# EAGLE board BTG (EAGLE 7.7.0)
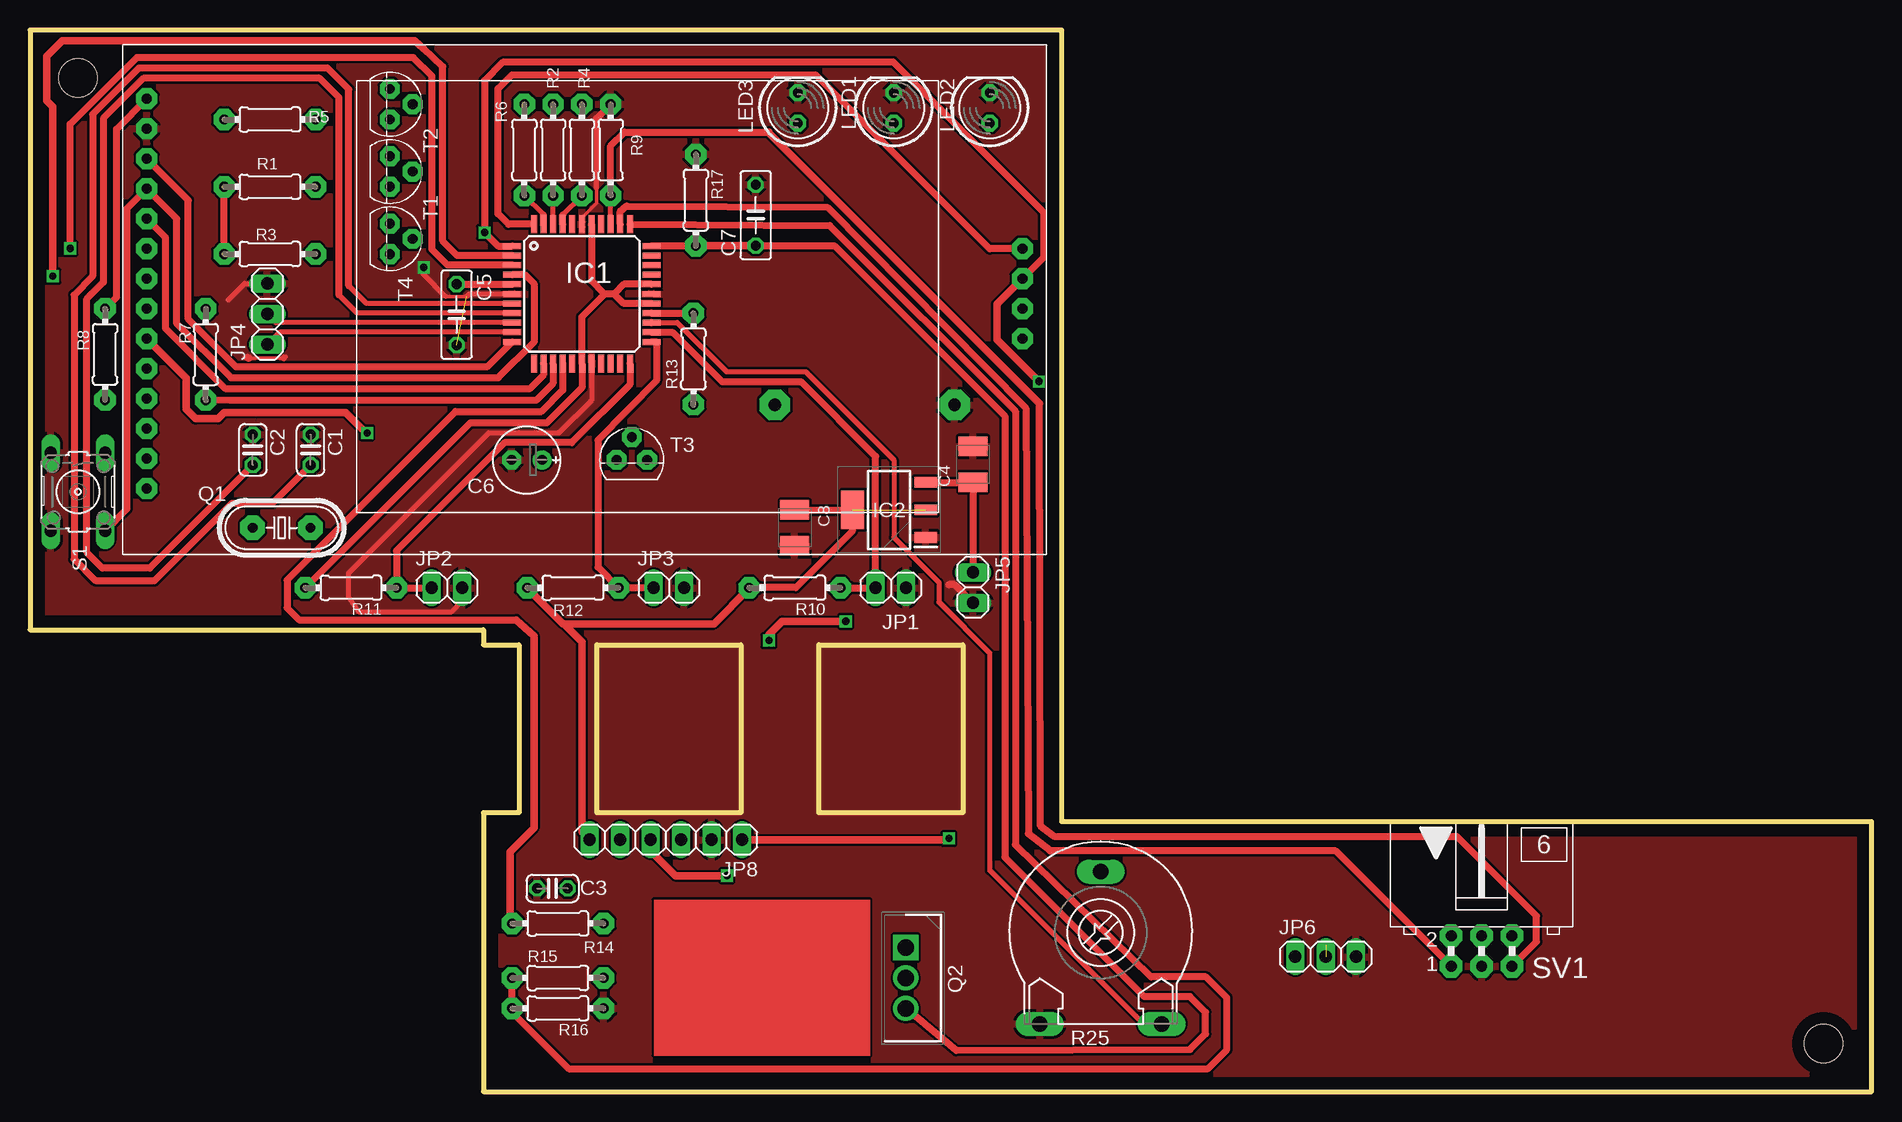
[diagram p0: board, top side]
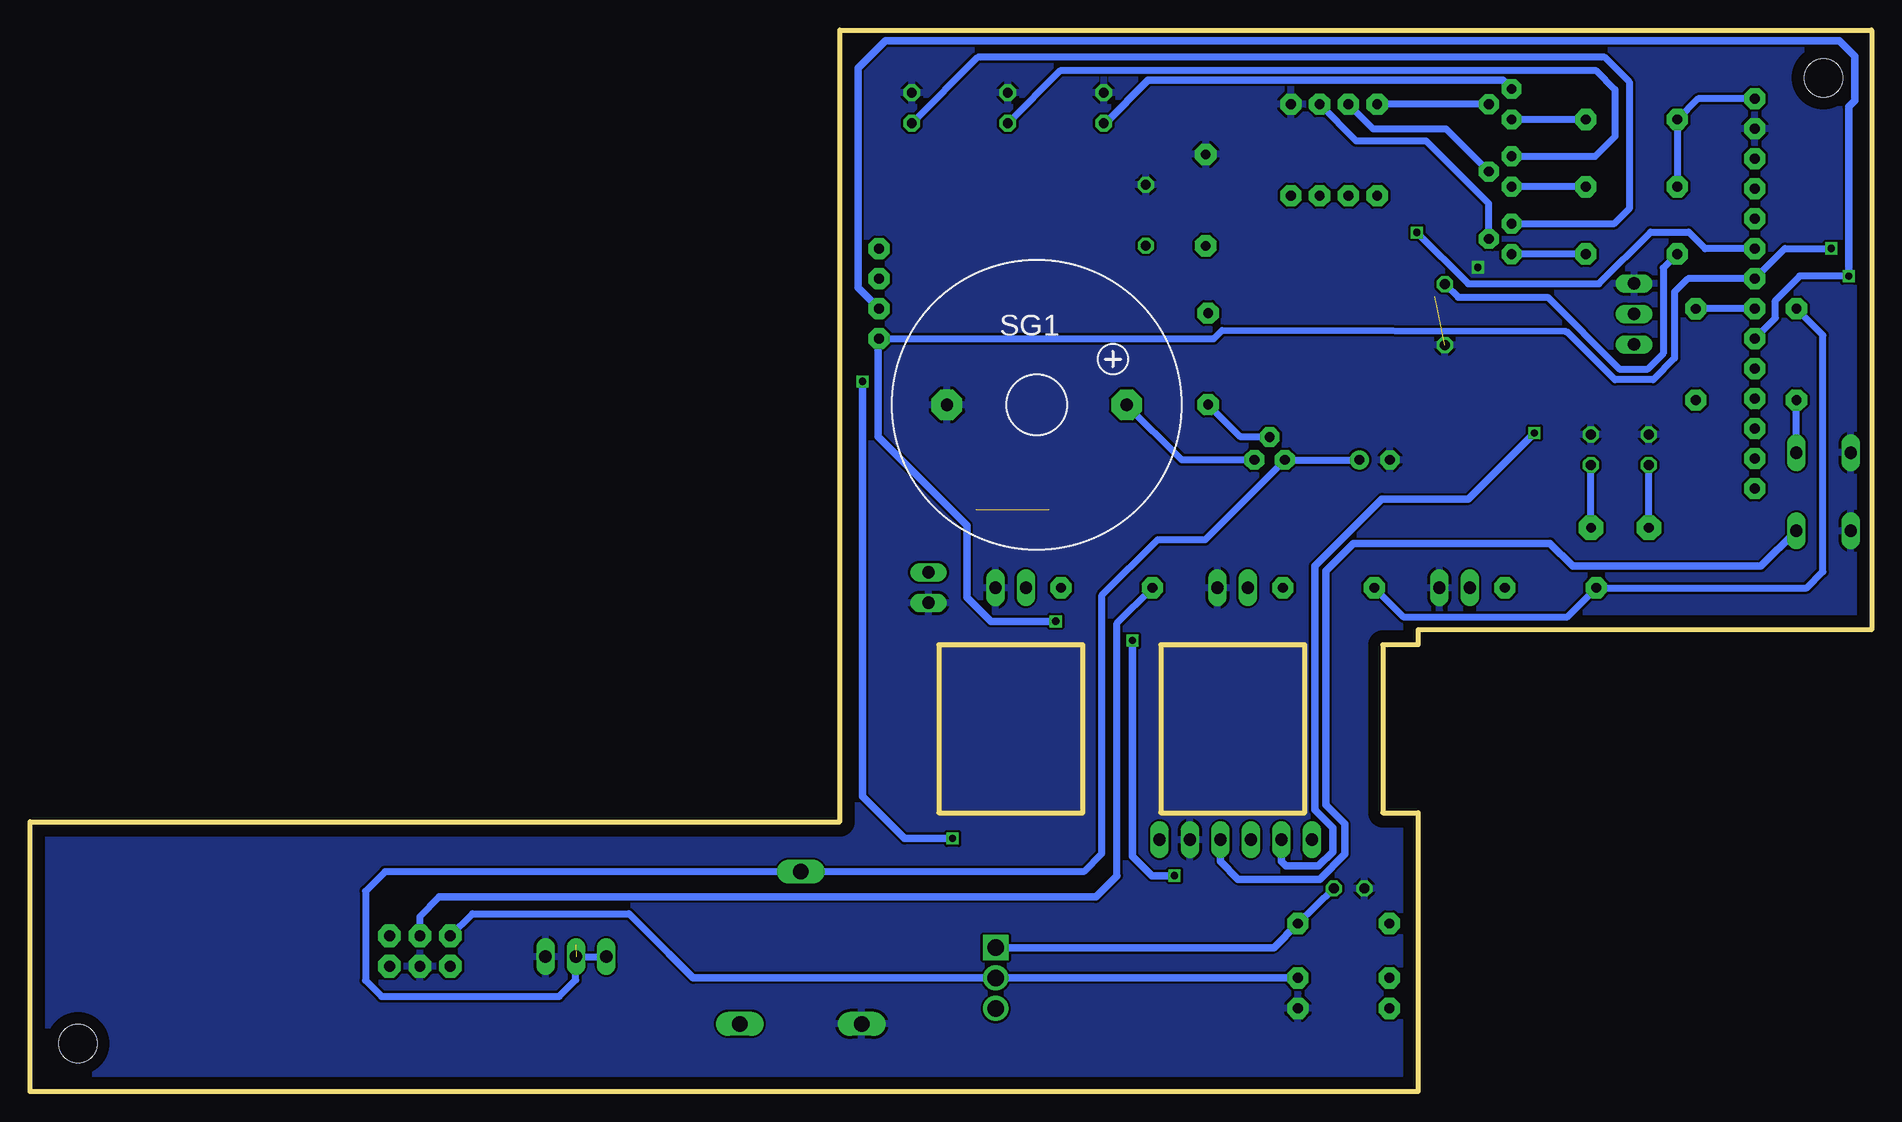
[diagram p1: board, bottom side, seen from below]

Size 153.5 x 88.5 mm. Coordinates in mm from the lower left corner, seen from the top.
Outline: 0,38.5 37.8,38.5 37.8,37.25 40.75,37.25 40.75,23.25 37.8,23.25 37.8,0 153.5,0 153.5,22.5 86,22.5 86,88.5 0,88.5 0,38.5
Copper layers (1*16): Top 0.035mm / dielectric 1.5mm / Bottom 0.035mm
Design rules "default": minimum track width 10mil, minimum drill 24mil, track to track 8mil, track to pad 8mil, pad to pad 8mil, via to via 8mil, smd to smd 8mil, copper to edge 40mil, drill to drill 8mil, minimum pad ring 10mil, minimum via ring 8mil, stop-mask expansion 4mil, vias tented up to drill 0mil, thermal gap 10mil
Holes 3.2 mm at 4.01,84.51 149.5,4
Milling: 8 lines

## Footprints (pad centres in the part's own frame; a part is rotated, then mirrored left to right if it is on the bottom)
C025-024X044 = drill 0.813 octagon: 1 -1.27,0; 2 1.27,0
SMC_B = smd 1.6 x 2.4: + -1.5,0; - 1.5,0
C050-025X075 = drill 0.813 octagon: 1 -2.54,0; 2 2.54,0
E2,5-6E = drill 0.813 pad 1.575: + -1.27,0 | drill 0.813 pad 1.575 octagon: - 1.27,0
TQFP44 = smd 1.5 x 0.5: 1 -5.8,4; 2 -5.8,3.2; 3 -5.8,2.4; 4 -5.8,1.6; 5 -5.8,0.8; 6 -5.8,0; 7 -5.8,-0.8; 8 -5.8,-1.6; 9 -5.8,-2.4; 10 -5.8,-3.2; 11 -5.8,-4; 23 5.8,-4; 24 5.8,-3.2; 25 5.8,-2.4; 26 5.8,-1.6; 27 5.8,-0.8; 28 5.8,0; 29 5.8,0.8; 30 5.8,1.6; 31 5.8,2.4; 32 5.8,3.2; 33 5.8,4 | smd 0.5 x 1.5: 12 -4,-5.8; 13 -3.2,-5.8; 14 -2.4,-5.8; 15 -1.6,-5.8; 16 -0.8,-5.8; 17 0,-5.8; 18 0.8,-5.8; 19 1.6,-5.8; 20 2.4,-5.8; 21 3.2,-5.8; 22 4,-5.8; 34 4,5.8; 35 3.2,5.8; 36 2.4,5.8; 37 1.6,5.8; 38 0.8,5.8; 39 0,5.8; 40 -0.8,5.8; 41 -1.6,5.8; 42 -2.4,5.8; 43 -3.2,5.8; 44 -4,5.8
SOT230P700X180-4N = smd 1.9 x 0.9: 1 -3.05,2.3; 2 -3.05,0; 3 -3.05,-2.3 | smd 1.9 x 3.2: 4 3.05,0
1X02 = drill 1.016 long: 1 -1.27,0; 2 1.27,0
1X03 = drill 1.016 long: 1 -2.54,0; 2 0,0; 3 2.54,0
1X06 = drill 1.016 long: 1 -6.35,0; 2 -3.81,0; 3 -1.27,0; 4 1.27,0; 5 3.81,0; 6 6.35,0
LED5MM = drill 0.813 pad 1.397 octagon: A -1.27,0; K 1.27,0
HC49U-V = drill 0.813 pad 2.032 octagon: 1 -2.413,0; 2 2.413,0
TO254P465X1031X1954-3P = drill 1.39 pad 2.085 square: 1 0,0 | drill 1.39 pad 2.085: 2 2.54,0; 3 5.08,0
0204/7 = drill 0.813 pad 1.778 octagon: 1 -3.81,0; 2 3.81,0
LI15 = drill 1.321 long: A -5.08,-7.62; E 5.08,-7.62; S 0,5.08
B3F-10XX = drill 1.016 long: 1 -3.251,2.261; 2 3.251,2.261; 3 -3.251,-2.261; 4 3.251,-2.261
F/CM04P = drill 1.016 pad 2.54 octagon: + 7.493,0; - -7.493,0
ML6L = drill 0.914 pad 1.905 octagon: 1 -2.54,-1.27; 2 -2.54,1.27; 3 0,-1.27; 4 0,1.27; 5 2.54,-1.27; 6 2.54,1.27
TO92 = drill 0.813 pad 1.651 octagon: 1 1.27,0; 2 0,1.905; 3 -1.27,0
ILI9341 = drill 0.8 pad 1.778 octagon: CS 2,-9.5; DC 2,-14.5; GND 2,-7; LED 2,-22; RESET 2,-12; SCK 2,-19.5; SD_CS 75,-17; SD_MISO 75,-22; SD_MOSI 75,-19.5; SD_SCK 75,-24.5; SDI(MOSI) 2,-17; SDO(MISO) 2,-24.5; T_CLK 2,-27; T_CS 2,-29.5; T_DIN 2,-32; T_DO 2,-34.5; T_IRQ 2,-37; VCC 2,-4.5

## Placement (x,y rotation side)
C1  [C025-024X044]  23.39,53.5 270 top
C2  [C025-024X044]  18.57,53.5 270 top
C3  [C025-024X044]  43.55,16.93 180 top
C4  [SMC_B]  78.6,52.29 90 top
C5  [C050-025X075]  35.56,64.77 270 top
C6  [E2,5-6E]  41.41,52.66 180 top
C7  [C050-025X075]  60.49,73.06 90 top
C8  [SMC_B]  63.74,47 270 top
IC1  ATMEGA644A  [TQFP44]  46,66.5 0 top
IC2  LMS8117AMP-3.3_NOPB  [SOT230P700X180-4N]  71.61,48.5 180 top
JP1  [1X02]  71.75,42 0 top
JP2  [1X02]  34.75,42 0 top
JP3  [1X02]  53.25,42 0 top
JP4  [1X03]  19.79,64.83 90 top
JP5  [1X02]  78.6,42.02 270 top
JP6  [1X03]  108,11.25 0 top
JP8  [1X06]  53,21 180 top
LED1  [LED5MM]  72,82 90 top
LED2  [LED5MM]  80,82 90 top
LED3  [LED5MM]  64,82 90 top
Q1  [HC49U-V]  20.97,47 0 top
Q2  IRLZ14PBF  [TO254P465X1031X1954-3P]  73,12 270 top
R1  [0204/7]  20,75.43 180 top
R2  [0204/7]  43.6,78.5 270 top
R3  [0204/7]  20,69.82 180 top
R4  [0204/7]  46,78.5 270 top
R5  [0204/7]  20,81.04 180 top
R6  [0204/7]  41.2,78.5 270 top
R7  [0204/7]  14.65,61.45 270 top
R8  [0204/7]  6.26,61.46 270 top
R9  [0204/7]  48.4,78.5 270 top
R10  [0204/7]  63.75,42 180 top
R11  [0204/7]  26.75,42 180 top
R12  [0204/7]  45.25,42 180 top
R13  [0204/7]  55.3,61.08 90 top
R14  [0204/7]  44,14.01 180 top
R15  [0204/7]  44,9.47 0 top
R16  [0204/7]  44,6.93 180 top
R17  [0204/7]  55.5,74.32 270 top
R25  [LI15]  89.25,13.25 0 top
S1  [B3F-10XX]  4,50 270 top
SG1  F/CM04P  [F/CM04P]  69.58,57.25 0 bottom
SV1  [ML6L]  121,11.71 0 top
T1  2N3904  [TO92]  30,76.7 270 top
T2  2N3904  [TO92]  30,82.31 270 top
T3  2N3904  [TO92]  50.16,52.66 0 top
T4  2N3904  [TO92]  30,71.09 270 top
U$1  ILI9341  [ILI9341]  7.73,87.27 0 top

## Library data of the parts
C1-C3 C5 C7 = resistor
C4 C6 C8 R1-R17 = rcl
IC1 = atmel; MPN: ATMEGA644PV-10AU; OC_FARNELL: 1455123; OC_NEWARK: 58M3748
IC2 = LMS8117AMP-3.3_NOPB; DESCRIPTION: LMS8117AMP-3.3/NOPB, Low Dropout Voltage Regulator, 1A, 3.3 V +/-1%, 2.5 15 Vin, 4-Pin SOT-223; HEIGHT: 1.8mm; MANUFACTURER_NAME: Texas Instruments; MANUFACTURER_PART_NUMBER: LMS8117AMP-3.3/NOPB; MOUSER_PART_NUMBER: 926-LMS8117AMP33NOPB; MOUSER_PRICE-STOCK: https://www.mouser.com/Search/Refine.aspx?Keyword=926-LMS8117AMP33NOPB; RS_PART_NUMBER: 5360313P; RS_PRICE-STOCK: http://uk.rs-online.com/web/p/products/5360313P
JP1-JP6 JP8 = pinhead
LED1-LED3 = led
Q1 = crystal; OC_FARNELL: 1666969; OC_NEWARK: unknown
Q2 = IRLZ14PBF; ARROW_PART_NUMBER: IRLZ14PBF; ARROW_PRICE-STOCK: https://www.arrow.com/en/products/irlz14pbf/vishay; DESCRIPTION: N-channel logicFET,IRLZ14 10A 60V; HEIGHT: 4.65mm; MANUFACTURER_NAME: Vishay; MANUFACTURER_PART_NUMBER: IRLZ14PBF; MOUSER_PART_NUMBER: 844-IRLZ14PBF; MOUSER_PRICE-STOCK: https://www.mouser.co.uk/ProductDetail/Vishay-Semiconductors/IRLZ14PBF?qs=cvaI6ThkwxuEdeJ8YmO4Qg%3D%3D
R25 = pot
S1 = switch-omron; MPN: B3F-1000; OC_FARNELL: 176432; OC_NEWARK: 36M3542
SG1 = buzzer; OC_FARNELL: unknown; OC_NEWARK: unknown
SV1 = con-ml; OC_FARNELL: unknown; OC_NEWARK: unknown
T1-T4 = transistor
U$1 = ILI9341

## Nets
+3V3: C5.1 C8.+ IC1.5 IC1.17 IC1.27 IC1.29 IC1.38 IC2.2 IC2.4 JP8.6 R1.2 R3.2 R5.2 R8.1 R10.2 R11.2 R12.2 SV1.4 U$1.VCC
+5V: C4.+ IC2.3 JP5.1
ADAPTER_BAT: IC1.36 R9.2 SV1.5
ADC3: IC1.34 R15.1 R16.2
ADC4: C7.1 IC1.33 Q2.3 R17.2
AUDIO_1: IC1.26 R13.2
AUDIO_2: IC1.25 R25.E
GND: C1.1 C2.1 C3.2 C4.- C5.2 C6.- C7.2 C8.- IC1.6 IC1.18 IC1.28 IC1.39 IC2.1 JP1.2 JP2.2 JP3.2 JP4.3 JP5.2 JP6.3 JP8.2 LED1.K LED2.K LED3.K R9.1 R16.1 R17.1 R25.A S1.3 S1.4 SG1.- SV1.3 U$1.GND
LED_GREEN: IC1.43 R6.2
LED_ORANGE: IC1.41 R4.2
LED_RED: IC1.42 R2.2
MISO: IC1.2 JP8.5 U$1.SD_MISO U$1.SDO(MISO)
MOSI: IC1.1 JP8.1 U$1.SD_MOSI U$1.SDI(MOSI)
N$1: R1.1 T1.1
N$2: R2.1 T1.2
N$3: LED1.A T1.3
N$4: LED2.A T4.3
N$5: R4.1 T4.2
N$6: R3.1 T4.1
N$7: R5.1 T2.1
N$8: R6.1 T2.2
N$9: LED3.A T2.3
N$10: R7.1 U$1.LED
N$11: C1.2 IC1.7 Q1.2
N$12: R8.2 S1.1
N$13: R13.1 T3.2
N$14: SG1.+ T3.1
N$15: C2.2 IC1.8 Q1.1
N$16: C6.+ JP6.1 JP6.2 R25.S T3.3
N$17: C3.1 Q2.1 R14.1
PWM: IC1.15 R14.2
RESET: IC1.4 JP8.3 S1.2 U$1.RESET
RX: IC1.9 JP4.2
SCK: IC1.3 JP8.4 U$1.SCK U$1.SD_SCK
SD_CS: IC1.44 U$1.SD_CS
TASTER_1: IC1.22 JP2.1 R11.1
TASTER_2: IC1.23 JP3.1 R12.1
TASTER_3: IC1.24 JP1.1 R10.1
TFT_CS: IC1.11 U$1.CS
TFT_DC: IC1.13 U$1.DC
TFT_LED: IC1.14 R7.2
TST_BAT: IC1.35 SV1.1
TX: IC1.10 JP4.1
V_BAT: Q2.2 R15.2 SV1.2

## Tracks (layer width: path | path; a pad name or v marks a point on that pad's centre or on a via)
+3V3  (1 unrouted)
  Top 0.6: 68.68,47.18 IC2.4 | IC1.29 49.49,67.3 48.69,66.5 | IC1.27 49.48,65.7 48.69,66.5 | 48.69,66.5 47.91,66.5 | 47.91,66.5 46.8,67.6 IC1.38 | 47.91,66.5 46,64.59 IC1.17 46,58.67 43.1,55.77 36.71,55.77 R11.2 | C8.+ IC2.4 | C5.1 IC1.5 | IC2.4 68.56,46.73 63.84,42.01 R10.2 | R3.2 R1.2 | R8.1 7.21,66.22 7.21,80.25 U$1.VCC
  Top 0.61: R12.2 44.44,39 44.5,39 | 44.5,39 57,39 59.94,41.94 R10.2 | JP8.6 46,21.65 46,37.5 44.5,39
  Bottom 0.6: R1.2 R5.2 14.46,82.77 U$1.VCC 9.71,82.79 | SV1.4 121,14.6 119.38,16.22 | 62.88,17.99 62.88,39.06 R10.2 | R8.1 4.05,63.06 4.05,43.34 5.39,42 R11.2 25.41,39.53 38.97,39.53 R12.2 | R3.2 17.36,68.65 17.36,61.53 18.69,60.2 20.96,60.2 26.98,66.22 34.45,66.22 C5.1
  Bottom 0.61: 62.88,17.99 64.65,16.22 119.38,16.22
+5V
  Top 0.6: JP5.1 C4.+ IC2.3
ADAPTER_BAT
  Top 0.406: IC1.36 R9.2
  Top 0.6: SV1.5 125.58,12.48 125.58,14.64 118.97,21.25 85.41,21.25 84.24,22.12 84.14,57.36 | R9.2 48.4,78.85 49.55,80 61.6,80
  Top 0.61: 61.6,80 61.6,79.9 84.1,57.4 arc90 84.14,57.36
ADC3
  Top 0.6: R15.1 R16.2 40.19,6.62 44.9,1.91 98.2,1.91 99.77,3.48 99.77,7.83 98.04,9.56 93.44,9.56 82.13,20.57 82.13,56.72 66.65,72.2 IC1.34
ADC4
  Top 0.6: IC1.33 R17.2 | Q2.3 77.2,3.42 96.7,3.52 97.98,4.8 97.98,6.62 96.69,7.91 92.88,7.91 81.25,19.54 81.25,56.32 67.05,70.52 C7.1
  Top 0.61: R17.2 arc-90 R17.2 C7.1
AUDIO_1
  Top 0.6: IC1.26 R13.2
AUDIO_2
  Top 0.4: 72.01,46.19 75.75,42.45
  Top 0.406: IC1.25 53.95,64.11 58.05,60.01 64.66,60.01 72.01,52.66 72.01,46.19 | 92.82,5.63 80.02,18.43 80.02,36.54 75.75,40.81 75.75,42.45
  Top 0.6: IC1.25 | R25.E 92.82,5.63
GND  (via drill 0.6)  (1 unrouted)
  Top 0.305: 46,72.87 47.21,74.08 47.21,75.29 | 36.4,66.29 34.66,66.29 | 21.08,61.13 18.22,61.13
  Top 0.4: IC1.39 46,72.87 | IC1.18 46.8,57.62 44.08,54.9 38.2,54.9 38.2,54.86 26.53,43.19 26.53,41.26 27.4,39.99 35.13,39.99 36.02,40.88 JP2.2 | 21.31,61.23 21.18,61.23 21.08,61.13 21.15,61.13 21.18,61.1 | 18.25,61.1 18.15,61.2 17.93,61.2 | 16.5,65.99 17.88,67.37 JP4.3 | IC1.6 36.61,66.5 36.4,66.29 | 34.66,66.29 32.81,68.14 v32.81,68.71
  Top 0.406: 47.21,75.29 47.21,81.12
  Top 0.6: 47.21,81.12 R9.1 | JP5.2 77.33,42.02 77.31,42.02 77.07,42.27 76.6,42.27
  Top 0.61: 18.22,61.13 18.15,61.2
  pour Bottom: -10,95 -10,-10 170,-10 170,95
  pour Top: -10,95 -10,-10 170,-10 170,95
LED_GREEN
  Top 0.406: 42.8,73.09 R6.2
  Top 0.6: IC1.43 42.8,73.09
LED_ORANGE
  Top 0.406: 44.4,73.09 R4.2
  Top 0.6: IC1.41 44.4,73.09
LED_RED
  Top 0.406: IC1.42 R2.2
MISO  (via drill 0.6)
  Top 0.6: 32.8,86.95 34.4,85.45 34.4,70.9 35.6,69.7 IC1.2
  Top 0.61: v28.1,54.9 28,54.9 26.3,56.6 16.2,56.6 15.7,56.1 13.8,56.1 13,56.9 13,59.5 U$1.SDO(MISO) | v1.9,67.98 1.9,82.1 1.4,82.6 1.4,86.3 2.7,87.6 32.05,87.6 32.8,86.95
  Bottom 0.6: U$1.SDO(MISO) 8.01,64.49 8.01,65.95 5.98,67.98 v1.9,67.98
  Bottom 0.61: JP8.5 49.2,19.2 48.8,18.8 46.1,18.8 44.9,20 44.9,22 46.4,23.5 46.4,43.8 40.8,49.4 33.6,49.4 v28.1,54.9 | 9.76,62.8 U$1.SDO(MISO) | v1.9,67.98 1.9,82.1 1.4,82.6 1.4,86.3 2.7,87.6 82.2,87.6 84.5,85.3 84.5,67.04 U$1.SD_MISO
MOSI  (via drill 0.6)
  Top 0.6: U$1.SD_MOSI 84.51,69.55 84.51,73.29 71.95,85.85 39.45,85.85 37.89,84.29 v37.89,71.62 39.01,70.5 IC1.1
  Top 0.61: JP8.1 76.5,21 v76.6,21.1 | v84.1,59.2 80.6,62.7 80.6,65.64 U$1.SD_MOSI
  Bottom 0.6: U$1.SDI(MOSI) 13.87,70.27 15.25,71.65 18.41,71.65 22.71,67.35 33.62,67.35 v37.89,71.62
  Bottom 0.61: v76.6,21.1 80.6,21.1 84.1,24.6 v84.1,59.2
N$1
  Bottom 0.6: R1.1 T1.1
N$2
  Bottom 0.6: T1.2 35.45,80.24 41.53,80.24 R2.1
N$3
  Bottom 0.6: T1.3 23.03,77.97 21.39,79.61 21.39,83.53 23,85.14 67.59,85.14 LED1.A
N$4
  Bottom 0.6: T4.3 21.42,72.36 20.19,73.59 20.19,84.18 22.23,86.22 74.51,86.22 LED2.A
N$5
  Bottom 0.6: T4.2 31.91,74.03 37.12,79.25 42.94,79.25 R4.1
N$6
  Bottom 0.6: R3.1 T4.1
N$7
  Bottom 0.6: R5.1 T2.1
N$8
  Bottom 0.6: T2.2 R6.1
N$9
  Bottom 0.61: T2.3 30.72,84.3 60.3,84.3 63.87,80.73 LED3.A
N$10
  Bottom 0.6: U$1.LED R7.1
N$11
  Top 0.406: IC1.7 28.05,65.7 26.57,67.18
  Top 0.6: C1.2 20.2,49.04 16.83,49.04 10.36,42.57 5.48,42.57 3.67,44.38 3.67,66.41 5.22,67.96 5.22,81.46 9.08,85.32 24.8,85.32 26.57,83.55 26.57,67.18
  Bottom 0.6: Q1.2 C1.2
N$12
  Bottom 0.6: S1.1 R8.2
N$13
  Bottom 0.6: T3.2 52.59,54.56 R13.1
N$14
  Bottom 0.6: T3.1 57.5,52.66 SG1.+
N$15
  Top 0.406: IC1.8 27.25,64.9 25.75,66.4
  Top 0.6: C2.2 9.98,43.64 6.04,43.64 4.74,44.94 4.74,66.09 6.11,67.46 6.11,81.13 9.44,84.46 24.16,84.46 25.75,82.87 25.75,66.4
  Bottom 0.6: Q1.1 18.56,52.22 C2.2
N$16  (1 unrouted)
  Bottom 0.6: C6.+ T3.3 55.55,46 59.51,46 64.17,41.34 64.17,19.82 65.66,18.33 R25.S 123.91,18.33 125.54,16.7 125.54,9.27 124.2,7.93 109.39,7.93 108.02,9.3 108.02,12.23 | JP6.2 JP6.1
N$17
  Bottom 0.6: R14.1 C3.1
  Bottom 0.61: Q2.1 49.82,12 R14.1
PWM
  Top 0.6: IC1.15 44.4,58.46 42.63,56.69 35.47,56.69 21.42,42.64 21.42,40.32 22.42,39.32 40.53,39.32
  Top 0.61: 40.53,39.32 42,38 42,22 40,20 40,14.2 R14.2
RESET
  Top 0.6: IC1.4 41.26,68.1 42,67.36 42,62.47 39.04,59.51 16.75,59.51 12.24,64.02 12.24,72.76 U$1.RESET 8.1,73.64 8.1,48.59 S1.2
  Bottom 0.61: JP8.3 54.27,19.17 52.8,17.7 46,17.7 43.9,19.8 43.9,22.3 45.5,23.9 45.5,43.4 43.2,45.7 26.8,45.7 24.9,43.8 9.21,43.8 S1.2
RX
  Top 0.406: IC1.9 20.52,64.1 JP4.2
SCK  (via drill 0.6)
  Top 0.6: IC1.3 34.8,68.9 33.5,70.2 33.5,84.65 31.95,86.2 8.9,86.2 3.35,80.65 v3.35,70.29
  Top 0.61: JP8.4 51.73,19.97 51.83,19.97 53.8,18 v58.1,18 | v61.6,37.6 61.6,38.1 62.7,39.2 v68,39.2
  Bottom 0.6: U$1.SD_SCK 54.82,62.77 54.14,63.45 25.44,63.35 25.34,63.3 21.39,59.35 18.2,59.35 16.42,61.13 16.42,66.65 15.3,67.77 U$1.SCK 7.21,70.29 v3.35,70.29
  Bottom 0.61: v68,39.2 73.4,39.2 75.4,41.2 75.4,47.2 82.8,54.6 82.8,62.7 U$1.SD_SCK | v58.1,18 60,18 61.6,19.6 v61.6,37.6
SD_CS
  Top 0.6: IC1.44 39.89,72.3 39.01,73.18 39.01,83.61 40.15,84.75 65.5,84.75 79.98,70.27 U$1.SD_CS
TASTER_1
  Top 0.6: IC1.22 50,58.94 45.15,54.09 39.56,54.09 30.56,45.09 R11.1 JP2.1
TASTER_2
  Top 0.6: IC1.23 52.21,62.5 52.21,59.27 47.34,54.3 47.34,43.72 R12.1 JP3.1
TASTER_3
  Top 0.6: IC1.24 53.56,63.3 57.69,59.17 64.25,59.17 70.48,52.94 JP1.1 R10.1
TFT_CS
  Top 0.6: IC1.11 38.1,60.4 17.17,60.4 13.19,64.38 13.19,74.31 U$1.CS
TFT_DC
  Top 0.6: IC1.13 42.8,59.74 41.64,58.58 16.33,58.58 11.3,63.61 11.3,71.2 U$1.DC
TFT_LED
  Top 0.6: IC1.14 43.6,59.04 42.18,57.62 16.67,57.62 R7.2
TST_BAT
  Top 0.6: IC1.35 49.19,73.37 49.73,73.81 66.47,73.72 83.02,56.96 83.22,21.49 85.06,20.05 108.85,20.05 SV1.1
TX
  Top 0.406: IC1.10 20.8,63.3 JP4.1
V_BAT
  Bottom 0.6: SV1.2 116.62,14.82 103.57,14.82 100.21,11.46
  Bottom 0.61: R15.2 Q2.2 98.21,9.46 100.21,11.46
(copper drawn outside any net)
  shapes: Top area x1